# Altium PCB PCB1.PcbDoc
Units mil, origin at the board's own origin, x right, y up, seen from the top; angles counter-clockwise.
Board outline 6600 x 3648.27 mil, 2 copper layers (Top Layer, Bottom Layer); 37 components, 33 nets, 147 pads, 0 vias.
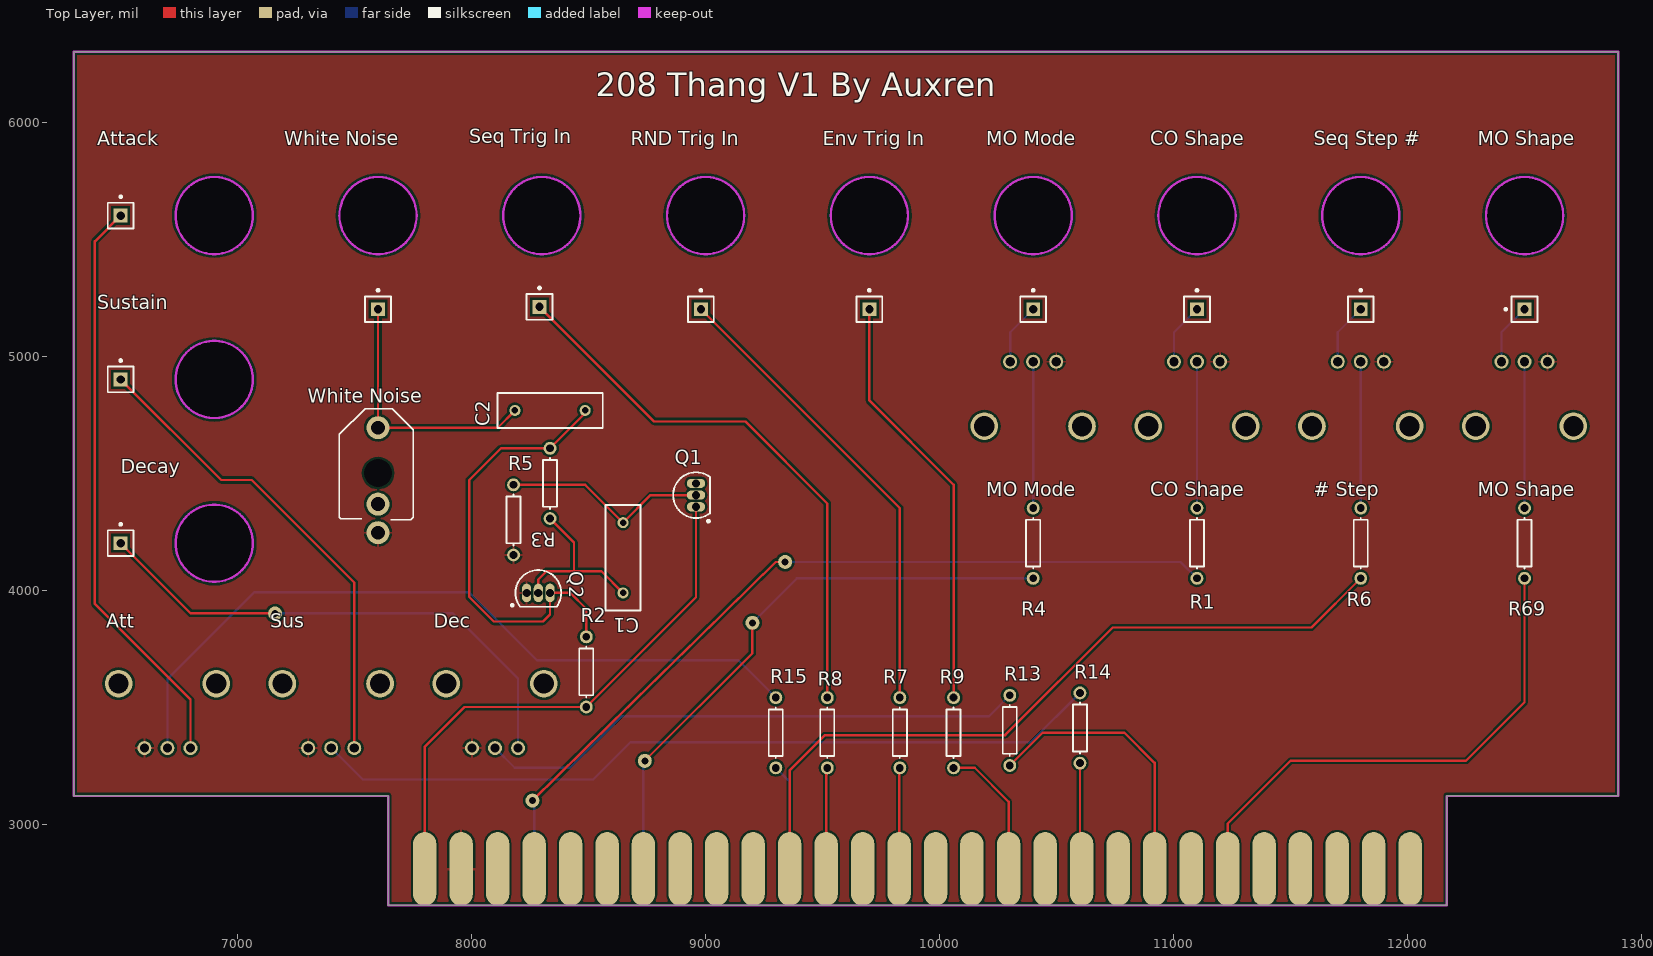
[diagram p0: Top Layer view]
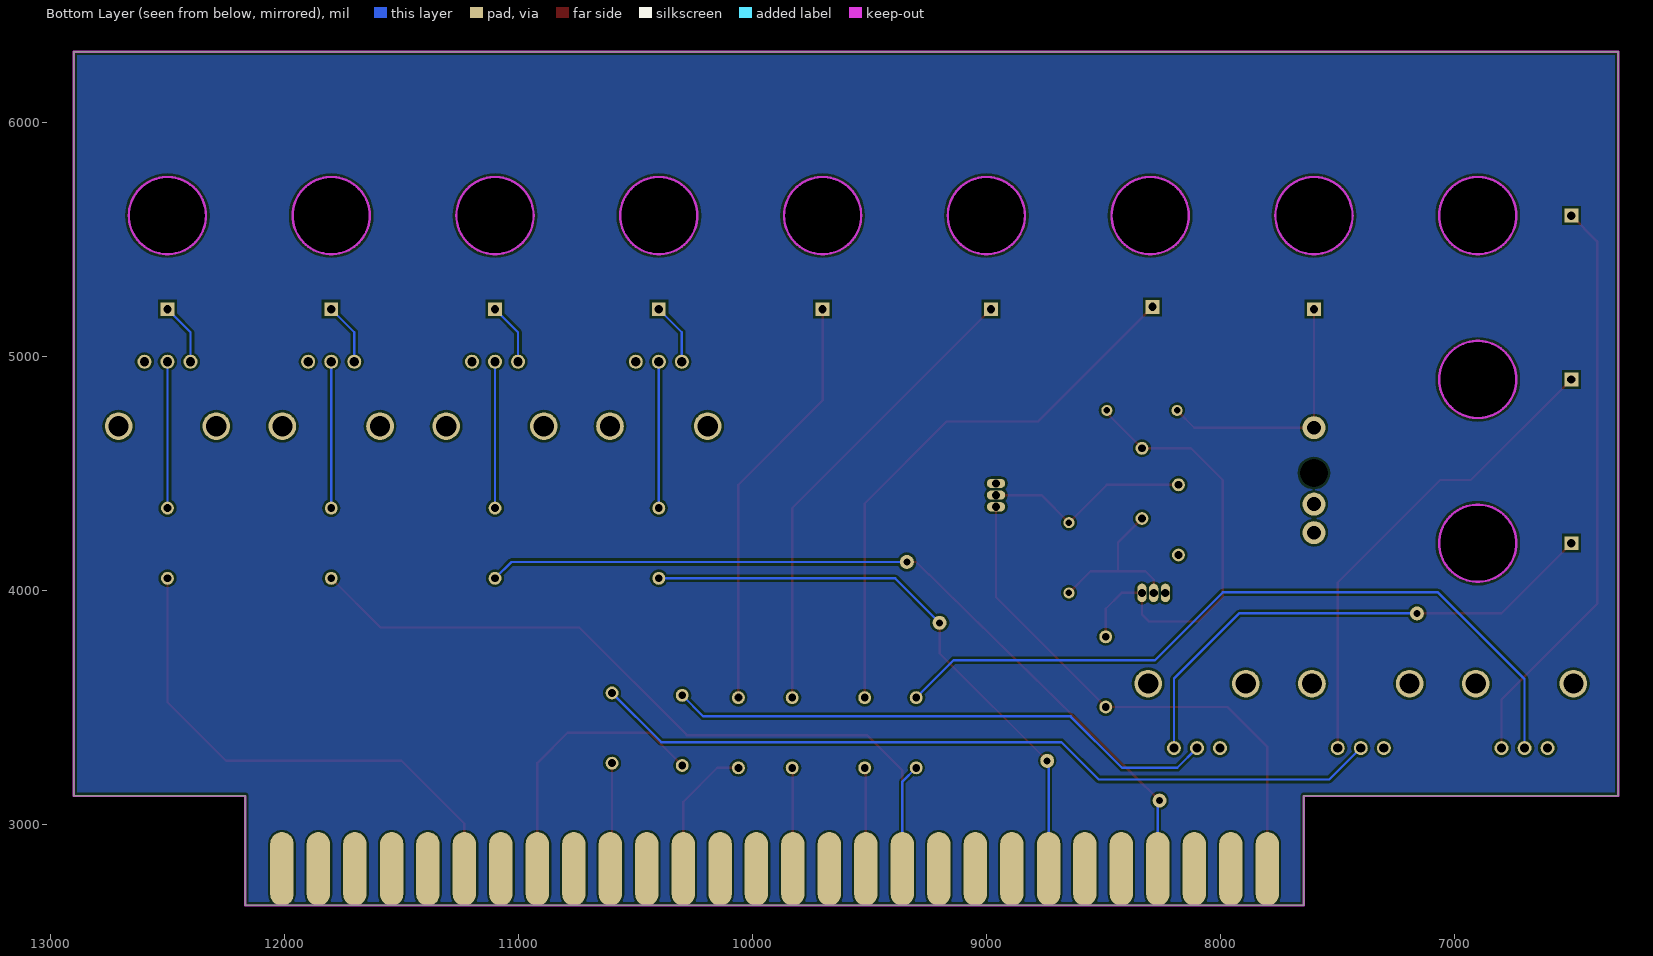
[diagram p1: Bottom Layer view, seen from below]

## Layer stack, top to bottom
Top Solder: solder mask 0.4, Solder Resist, Dk 3.5
Top Layer: signal copper 1.4
Dielectric 1: dielectric 12.6, FR-4, Dk 4.8
Bottom Layer: signal copper 1.4
Bottom Solder: solder mask 0.4, Solder Resist, Dk 3.5

## Board outline
6300,3119.68 6300,6300 12900,6300 12900,3119.68 12166.77,3119.68 12166.77,2651.73 7643.23,2651.73 7643.23,3119.68
cut-out: 6735,5600 ccw(c6900,5600) 6900,5435 ccw(c6900,5600) 7065,5600 ccw(c6900,5600) 6900,5765 ccw(c6900,5600)
cut-out: 6735,4900 ccw(c6900,4900) 6900,4735 ccw(c6900,4900) 7065,4900 ccw(c6900,4900) 6900,5065 ccw(c6900,4900)
cut-out: 6735,4200 ccw(c6900,4200) 6900,4035 ccw(c6900,4200) 7065,4200 ccw(c6900,4200) 6900,4365 ccw(c6900,4200)
cut-out: 7435,5600 ccw(c7600,5600) 7600,5435 ccw(c7600,5600) 7765,5600 ccw(c7600,5600) 7600,5765 ccw(c7600,5600)
cut-out: 8135,5600 ccw(c8300,5600) 8300,5435 ccw(c8300,5600) 8465,5600 ccw(c8300,5600) 8300,5765 ccw(c8300,5600)
cut-out: 8835,5600 ccw(c9000,5600) 9000,5435 ccw(c9000,5600) 9165,5600 ccw(c9000,5600) 9000,5765 ccw(c9000,5600)
cut-out: 9535,5600 ccw(c9700,5600) 9700,5435 ccw(c9700,5600) 9865,5600 ccw(c9700,5600) 9700,5765 ccw(c9700,5600)
cut-out: 10235,5600 ccw(c10400,5600) 10400,5435 ccw(c10400,5600) 10565,5600 ccw(c10400,5600) 10400,5765 ccw(c10400,5600)
cut-out: 10935,5600 ccw(c11100,5600) 11100,5435 ccw(c11100,5600) 11265,5600 ccw(c11100,5600) 11100,5765 ccw(c11100,5600)
cut-out: 11635,5600 ccw(c11800,5600) 11800,5435 ccw(c11800,5600) 11965,5600 ccw(c11800,5600) 11800,5765 ccw(c11800,5600)
cut-out: 12335,5600 ccw(c12500,5600) 12500,5435 ccw(c12500,5600) 12665,5600 ccw(c12500,5600) 12500,5765 ccw(c12500,5600)

## Design rules (kind name [scope] priority, off if disabled: settings)
BoardOutlineClearance [All] p1: gap=10 ignorepadtopadclearanceinfootprint=FALSE except(0: Arc-SplitContinuation Track-SplitContinuation SMDPad-SplitContinuation THPad-SplitContinuation Via-SplitContinuation Fill-SplitContinuation Poly-SplitContinuation Region-SplitContinuation Text-SplitContinuation)
Clearance [All] p1: gap=10 ignorepadtopadclearanceinfootprint=FALSE except(0: Arc-Hole Track-Hole SMDPad-Hole THPad-Hole Via-Hole Fill-Hole Poly-Hole Region-Hole Text-Hole)
PolygonConnect [All] p1: connectstyle=Relief reliefconductorwidth=10 reliefentries=4 polygonreliefangle="90 Angle" airgapwidth=10
RoomDefinition Sheet1 [InComponentClass('Sheet1')] p1: confinementstyle=ConfineIn formatcopy=TRUE lockcomponents=FALSE outline 0,0 2000,0 2000,1000 0,1000
RoutingVias [All] p1: holewidth=28 width=50 viastyle="Through Hole" minholewidth=28 minwidth=50 maxholewidth=28 maxwidth=50
SolderMaskExpansion [All] p1: expansion=4
Width [All] p1: maxlimit=10 minlimit=10 preferedwidth=10
30 further rules are at their usual default settings.

## Classes and differential pairs
component class Sheet1: "# Step" Att Attack C1 C2 "CO Shape" Dec Decay "Env Trig In" "MO Mode" "MO Shape" Q1 Q2 R1 R2 R3 R4 R5 R6 R7 R8 R9 R13 R14 R15 "RND Trig In" "Seq Step #" "Seq Trig In" Sus Sustain VR4 VR5 "White Noise"

## Components (designator, comment, footprint, x,y, rotation, side; value= is the part's Value field where it differs from the comment)
"# Step" "50k" SonGueiPot 11800,4700 r180 top
Att "50k" SonGueiPot 6700,3600 r0 top
Attack "Plug" PIN1 6500,5600 r0 top
C1 "Cap" RAD-0.3 8647.09,4137.64 r270 top
C2 "Cap" RAD-0.3 8335.12,4767.56 r180 top
"CO Shape" "Plug" PIN1 11100,5200 r0 top
"CO Shape" "50k" SonGueiPot 11100,4700 r180 top
Con1 "Buchla Program Card Connector" PCBComponent_1 9826.93,2807.72 r0 top
Dec "50k" SonGueiPot 8100,3600 r0 top
Decay "Plug" PIN1 6500,4200 r0 top
"Env Trig In" "Plug" PIN1 9700,5200 r0 top
"MO Mode" "Plug" PIN1 10400,5200 r0 top
"MO Mode" "50k" SonGueiPot 10400,4700 r180 top
"MO Shape" "Plug" PIN1 12500,5200 r90 top
"MO Shape" "50k" SonGueiPot 12500,4700 r180 top
Q1 "2N3904" TO-92A 8959.06,4405.59 r0 top
Q2 "2N3904" TO-92A 8285.12,3987.64 r270 top
R1 "Res1" AXIAL-0.3 11100,4200 r270 top
R2 "Res1" AXIAL-0.3 8490,3650 r90 top
R3 "Res1" AXIAL-0.3 8335.12,4455.59 r270 top
R4 "Res1" AXIAL-0.3 10400,4200 r270 top
R5 "Res1" AXIAL-0.3 8179.13,4299.61 r90 top
R6 "Res1" AXIAL-0.3 11800,4200 r270 top
R7 "Res1" AXIAL-0.3 9830,3390 r270 top
R8 "Res1" AXIAL-0.3 9520,3390 r270 top
R9 "Res1" AXIAL-0.3 10060,3390 r270 top
R13 "Res1" AXIAL-0.3 10300,3400 r90 top
R14 "Res1" AXIAL-0.3 10600,3410 r90 top
R15 "Res1" AXIAL-0.3 9300,3390 r90 top
R69 "Res1" AXIAL-0.3 12500,4200 r270 top (schematic designator R?)
"RND Trig In" "Plug" PIN1 8980,5200 r0 top
"Seq Step #" "Plug" PIN1 11800,5200 r0 top
"Seq Trig In" "Plug" PIN1 8290,5210 r0 top
Sus "50k" SonGueiPot 7400,3600 r0 top
Sustain "Plug" PIN1 6500,4900 r0 top
"White Noise" "Plug" PIN1 7600,5200 r0 top
"White Noise" "Thonkicon jack" "Thonkiconn Pot PJ301M" 7600,4500 r0 top

## Footprints (in the part's own frame and the unit in brackets; to place one, negate y for a bottom-side part, rotate by r counter-clockwise, add the part's x,y. Pads: shape width x height; smd on the part's side, far side on the other; paste and mask are expansions set on the pad)
AXIAL-0.3 [mm] "Axial Device, Thru-Hole; 2 Leads; 0.3 in Pin Spacing"
  round 1.4 hole 0.85: 1(-3.81,0) 2(3.81,0)
  silkscreen extent -2.77,-0.76 2.77,0.76
PCBComponent_1 [mil]
  oval 100x315 smd: 1(-2027.78,0) 2(-1871.8,0) 3(-1715.8,0) 4(-1559.8,0) 5(-1403.78,0) 6(-1247.87,0) 7(-1092.8,0) 8(-935.8,0) 9(-779.8,0) 10(-623.92,0) 11(-467.94,0) 12(-311.94,0) 13(-155.94,0) 14(0.08,0) 15(155.98,0) 16(311.06,0) 17(468.06,0) 18(624.06,0) 19(779.94,0) 20(935.92,0) 21(1091.92,0) 22(1247.92,0) 23(1403.94,0) 24(1559.84,0) 25(1714.92,0) 26(1871.92,0) 27(2027.92,0) 28(2183.78,0)
  oval 100x315 smd far side: 29(2183.78,0) 30(2027.92,0) 31(1871.92,0) 32(1714.92,0) 33(1559.84,0) 34(1403.94,0) 35(1247.92,0) 36(1091.92,0) 37(935.92,0) 38(779.94,0) 39(624.06,0) 40(468.06,0) 41(311.06,0) 42(155.98,0) 43(0.08,0) 44(-155.94,0) 45(-311.94,0) 46(-467.94,0) 47(-623.92,0) 48(-779.8,0) 49(-935.8,0) 50(-1092.8,0) 51(-1247.87,0) 52(-1403.78,0) 53(-1559.8,0) 54(-1715.8,0) 55(-1871.8,0) 56(-2027.78,0)
PIN1 [mm] "Connector; Plug"
  rect 1.5x1.5 hole 0.9: 1(0,0)
  silkscreen extent -1.4,-1.4 1.4,2.17
RAD-0.3 [mm] "Radial Cap, Thru-Hole; 2 Leads; 0.3 in Pin Spacing"
  round 1.2 hole 0.7: 1(-3.81,0) 2(3.81,0)
  silkscreen extent -5.71,-1.91 5.72,1.91
SonGueiPot [mm]
  round 3 hole 2.2: 0(-5.3,0) 0(5.3,0)
  round 1.524 hole 1: 1(-2.5,-7) 2(0,-7) 3(2.5,-7)
  body extent -4.88,-7.23 4.88,5.32, height 20
"Thonkiconn Pot PJ301M" [mm] "PJ301 Thonkicon Jack from Thonk"
  round 1.524 hole 3: 0(0,0)
  round 2.5 hole 1.5: 1(0,-6.48) 2(0,-3.38) 3(0,4.92)
  silkscreen extent -4.19,-5.08 3.81,6.98, body extent -4.55,-10.29 4.44,5.71, height 14
TO-92A [mm] "TO, Flat Index; 3 In-Line, Axial Leads; Body Dia. 4.5mm; Leads 0.51 x 0.48 mm (max)"
  oval 2x1 hole 0.9: 1(0,-1.27) 2(0,0) 3(0,1.27)
  silkscreen extent -2.48,-2.95 1.5,2.48, body extent -2.48,-2.5 1.5,2.5, height 6.86

## Part data
"# Step" Att "CO Shape" Dec "MO Mode" "MO Shape" Sus: library part CMP-0972-00009-1, "Trimming Potentiometer, 5K Ohm +/- 10%, -55 to 125 degC, 3-Pin 19.05 x 4.83 x 6.6 mm THD, Transparent Housing, RoHS"
C1 C2: "Capacitor"
Con1: library part 208ProgramCard
Q1 Q2: "NPN General Purpose Amplifier"
R1 R2 R3 R4 R5 R6 R7 R8 R9 R13 R14 R15 R69: "Resistor"

## Free pads (board coordinates)
  round 60 hole 30: 0(7160,3900) 2(8260,3100) 3(9340,4120) 4(9200,3860) 5(8740,3270)

## Nets (pads, with @x,y where several pads share a name; then routed paths per layer and width w, separated by ;. In a path a pad name is that pad's centre, name@x,y a point inside that pad or via, vN(x,y) a via of type N, cw(c..) or ccw(c..) an arc to the next point about the centre after c; other vN are vias at no path point)
+15V: Con1.1 Q1.1 R2.1 | length 2332.9
  Top Layer w10: Con1.1 7799.15,3329.15 7970,3500 R2.1 8959.06,3969.06 Q1.1
GND: "# Step.1" "CO Shape.1"@11198.43,4975.59 "MO Mode.1"@10498.43,4975.59 "MO Shape.1"@12598.43,4975.59 "White Noise.1"@7600,4244.88 Att.1 Con1.2 Dec.1 Q2.1 R5.1 Sus.1
"Net# Step_2": "# Step.2" R6.1 | length 625.6
  Bottom Layer w10: R6.1 11800,4975.59
"Net# Step_3": "# Step.3" "Seq Step #.1" | length 265.2
  Bottom Layer w10: 11701.57,4975.59 11701.57,5101.57 11800,5200
NetAtt_2: Att.2 R15.2 | length 3235.2
  Bottom Layer w10: Att.2 6700,3620 7070,3990 7990,3990 8280,3700 9140,3700 R15.2
NetAtt_3: Att.3 Attack.1 | length 2490.3
  Top Layer w10: Attack.1 6390,5490 6390,3940 6798.43,3531.57 Att.3
NetC1_1: C1.1 Q1.2 R5.2 | length 895.9
  Top Layer w10: R5.2 8485.12,4449.61 C1.1 8765.04,4405.59 Q1.2
NetC1_2: C1.2 Q2.2 R3.2 | length 740.1
  Top Layer w10: Q2.2 8285.12,4045.12 8320,4080 8437.36,4080 ; R3.2 8437.36,4203.35 8437.36,4080 ; C1.2 8554.72,4080 8437.36,4080
NetC2_1: C2.1 Q2.3 R2.2 R3.1 | length 1921.4
  Top Layer w10: C2.1 8485.12,4755.59 R3.1 8125.59,4605.59 7990,4470 7990,3970 8094.88,3865.12 8304.53,3865.12 8335.12,3895.71 Q2.3 8422.36,3987.64 8490,3920 R2.2
NetC2_2: "White Noise.1"@7600,5200 "White Noise.3" C2.2 | length 1122
  Top Layer w10: 7600,5200 7600,4693.7 8111.26,4693.7 C2.2
"NetCO Shape_1": "CO Shape.1"@11100,5200 "CO Shape.3" | length 265.2
  Bottom Layer w10: 11001.57,4975.59 11001.57,5101.57 11100,5200
"NetCO Shape_2": "CO Shape.2" R1.1 | length 625.6
  Bottom Layer w10: R1.1 11100,4975.59
NetCon1_11: Con1.11 R6.2 | length 3202.4
  Top Layer w10: Con1.11 9358.99,3228.99 9510,3380 10280,3380 10740,3840 11590,3840 R6.2
NetCon1_12: Con1.12 R8.2 | length 434.4
  Top Layer w10: Con1.12 9514.99,3234.99 R8.2
NetCon1_14: Con1.14 R7.2 | length 433.5
  Top Layer w10: Con1.14 9827.01,3237.01 R7.2
NetCon1_17: Con1.17 R9.2 | length 582.3
  Top Layer w10: R9.2 10150,3240 10294.99,3095.01 Con1.17
NetCon1_19: Con1.19 R14.1 | length 455.1
  Top Layer w10: R14.1 10600,2814.58 Con1.19
NetCon1_21: Con1.21 R13.1 | length 1183.6
  Top Layer w10: R13.1 10440,3390 10790,3390 10918.85,3261.15 Con1.21
NetCon1_23: Con1.23 R69.2 | length 2207.3
  Top Layer w10: Con1.23 11230.87,3000.87 11500,3270 12250,3270 12500,3520 R69.2
NetCon1_46: Con1.46 R15.1 | length 456.7
  Bottom Layer w10: R15.1 9358.99,3181.01 Con1.46
NetCon1_50: Con1.50 pad.4 pad.5 R4.2 | length 2524
  Top Layer w10: pad.5 9200,3730 pad.4
  Bottom Layer w10: Con1.50 8734.13,3264.13 pad.5 ; pad.4 9390,4050 R4.2
NetCon1_53: Con1.53 pad.2 pad.3 R1.2 | length 3579.8
  Top Layer w10: pad.2 9300,4120 pad.3
  Bottom Layer w10: pad.2 8267.13,3087.13 Con1.53 ; pad.3 11030,4120 R1.2
NetDec_2: Dec.2 R13.2 | length 2363.4
  Bottom Layer w10: Dec.2 8184.41,3240 8420,3240 8640,3460 10210,3460 R13.2
NetDec_3: Dec.3 Decay.1 pad.0 | length 2245.2
  Top Layer w10: Decay.1 6800,3900 pad.0 pad.0@7170,3900
  Bottom Layer w10: pad.0 7920,3900 8198.43,3621.57 Dec.3
"NetEnv Trig In_1": "Env Trig In.1" R9.1 | length 1809.1
  Top Layer w10: 9700,5200 9700,4810 10060,4450 R9.1
"NetMO Mode_1": "MO Mode.1"@10400,5200 "MO Mode.3" | length 265.2
  Bottom Layer w10: 10301.57,4975.59 10301.57,5101.57 10400,5200
"NetMO Mode_2": "MO Mode.2" R4.1 | length 625.6
  Bottom Layer w10: R4.1 10400,4975.59
"NetMO Shape_1": "MO Shape.1"@12500,5200 "MO Shape.3" | length 265.2
  Bottom Layer w10: 12401.57,4975.59 12401.57,5101.57 12500,5200
"NetMO Shape_2": "MO Shape.2" R69.1 | length 625.6
  Bottom Layer w10: R69.1 12500,4975.59
NetR7_1: "RND Trig In.1" R7.1 | length 2012.1
  Top Layer w10: 8980,5200 9830,4350 R7.1
NetR8_1: "Seq Trig In.1" R8.1 | length 2407.9
  Top Layer w10: 8290,5210 8780,4720 9170,4720 9520,4370 R8.1
NetR14_2: R14.2 Sus.2 | length 3408.9
  Bottom Layer w10: Sus.2 7534.41,3190 8520,3190 8680,3350 10390,3350 R14.2
NetSus_3: Sus.3 Sustain.1 | length 2065.3
  Top Layer w10: Sustain.1 6930,4470 7060,4470 7498.43,4031.57 Sus.3
pads on no net: "# Step.0" "CO Shape.0" "MO Mode.0" "MO Shape.0" "White Noise.0" "White Noise.2" Att.0 Con1.3 Con1.4 Con1.5 Con1.6 Con1.7 Con1.8 Con1.9 Con1.10 Con1.13 Con1.15 Con1.16 Con1.18 Con1.20 Con1.22 Con1.24 Con1.25 Con1.26 Con1.27 Con1.28 Con1.29 Con1.30 Con1.31 Con1.32 Con1.33 Con1.34 Con1.35 Con1.36 Con1.37 Con1.38 Con1.39 Con1.40 Con1.41 Con1.42 Con1.43 Con1.44 Con1.45 Con1.47 Con1.48 Con1.49 Con1.51 Con1.52 Con1.54 Con1.55 Con1.56 Dec.0 Q1.3 Sus.0

## Polygon pours and split planes (outlines as drawn)
GND on Top Layer "Mechanical 1-No Net" (solid, pour order 0): 5757.27,7911.15 5687.27,7841.15 5687.27,2191.15 13297.27,2191.15 13307.27,2181.15 13267.27,2221.15 13267.27,7861.15 13267.27,7831.15 13297.27,7801.15
no net on Bottom Layer "Mechanical 1-No Net" (solid, pour order 2): 5983.31,7985.76 5913.31,7915.76 5913.31,2265.76 13523.31,2265.76 13533.31,2255.76 13493.31,2295.76 13493.31,7935.76 13493.31,7905.76 13523.31,7875.76

## Keep-outs
Keep-Out Layer:
  circle w10: c10400,5600 r165
  circle w10: c11100,5600 r165
  circle w10: c9700,5600 r165
  circle w10: c8300,5600 r165
  circle w10: c11800,5600 r165
  circle w10: c9000,5600 r165
  circle w10: c6900,4900 r165
  circle w10: c6900,4200 r165
  circle w10: c7600,5600 r165
  circle w10: c6900,5600 r165
  circle w10: c12500,5600 r165
  lines w10: 6300,3119.68 7643.23,3119.68 7643.23,2807.72 7643.23,2651.73 12166.77,2651.73 12166.77,3119.68 12900,3119.68 12900,6300 6300,6300 6300,3119.68

## Silkscreen, mask and mechanical layers (free items; w line width, h text height)
Top Overlay:
  text "208 Thang V1 By Auxren" at 8530,6110 h100